# Altium PCB HeaterBoard_v1.PcbDoc
Units mm, origin at the board's own origin, x right, y up, seen from the top; angles counter-clockwise.
Board outline 55.12 x 85.09 mm, 2 copper layers (Top Layer, Bottom Layer); 1 components, 2 nets, 10 pads, 4 vias.
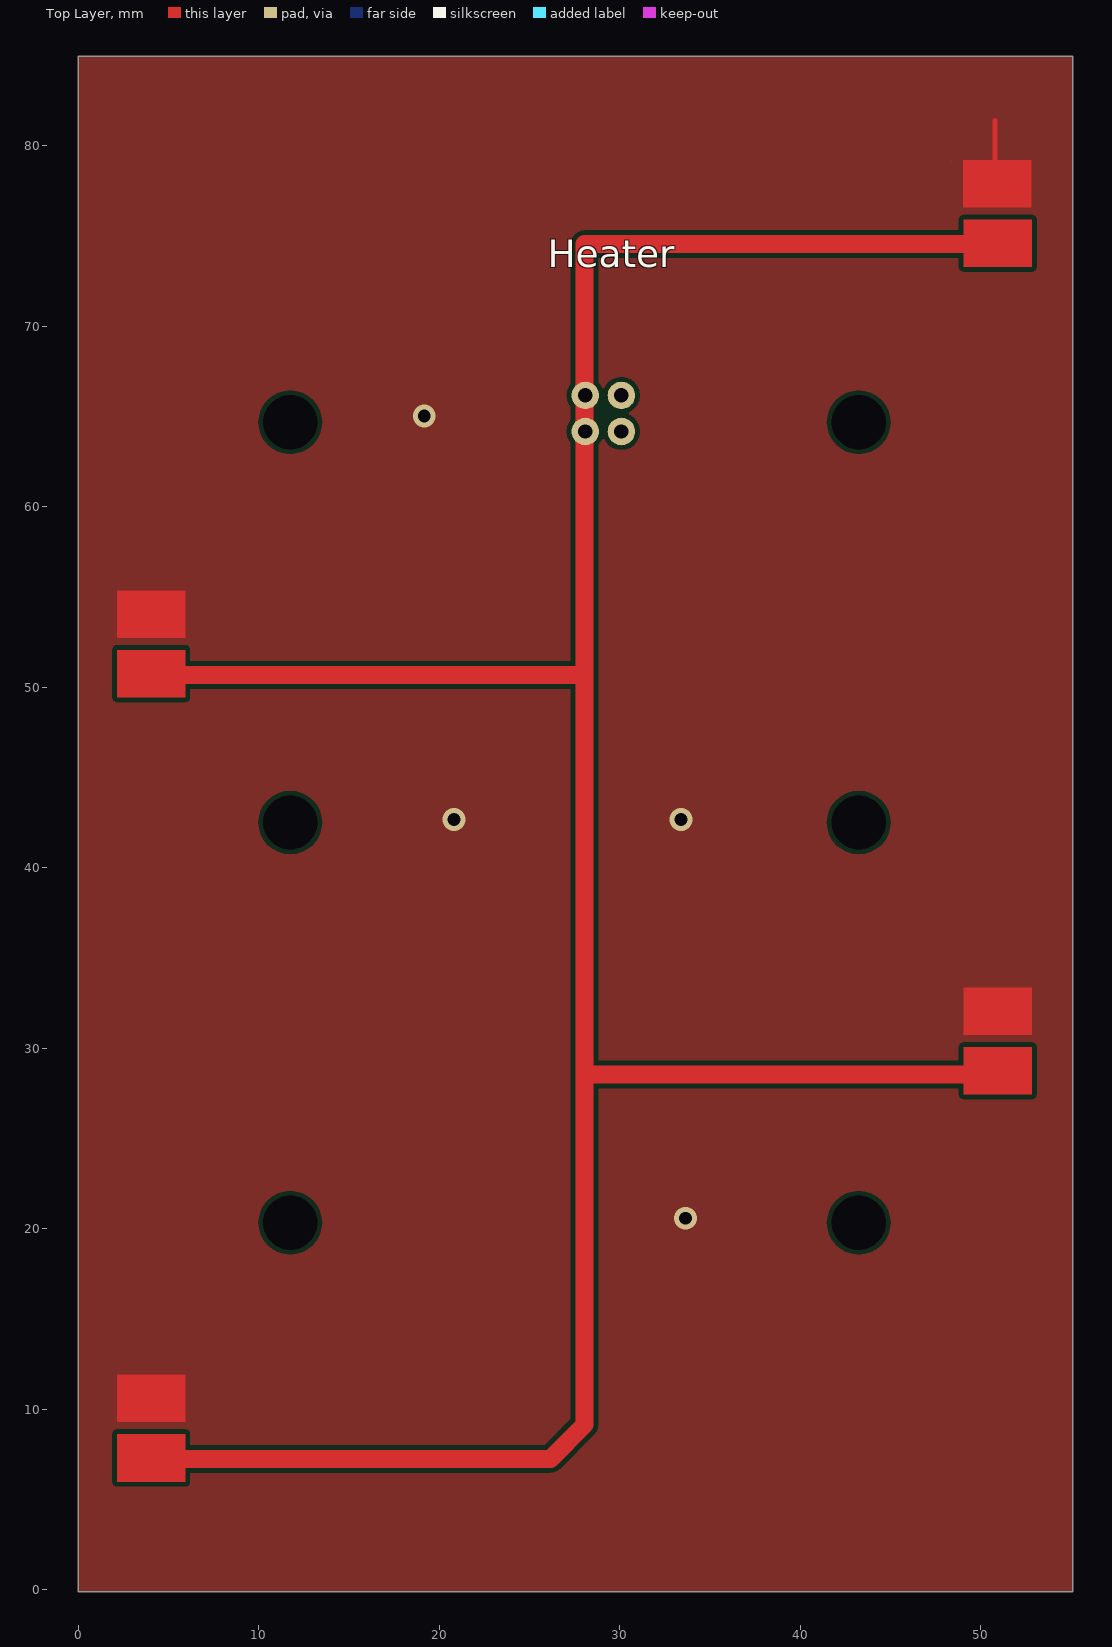
[diagram p0: Top Layer view]
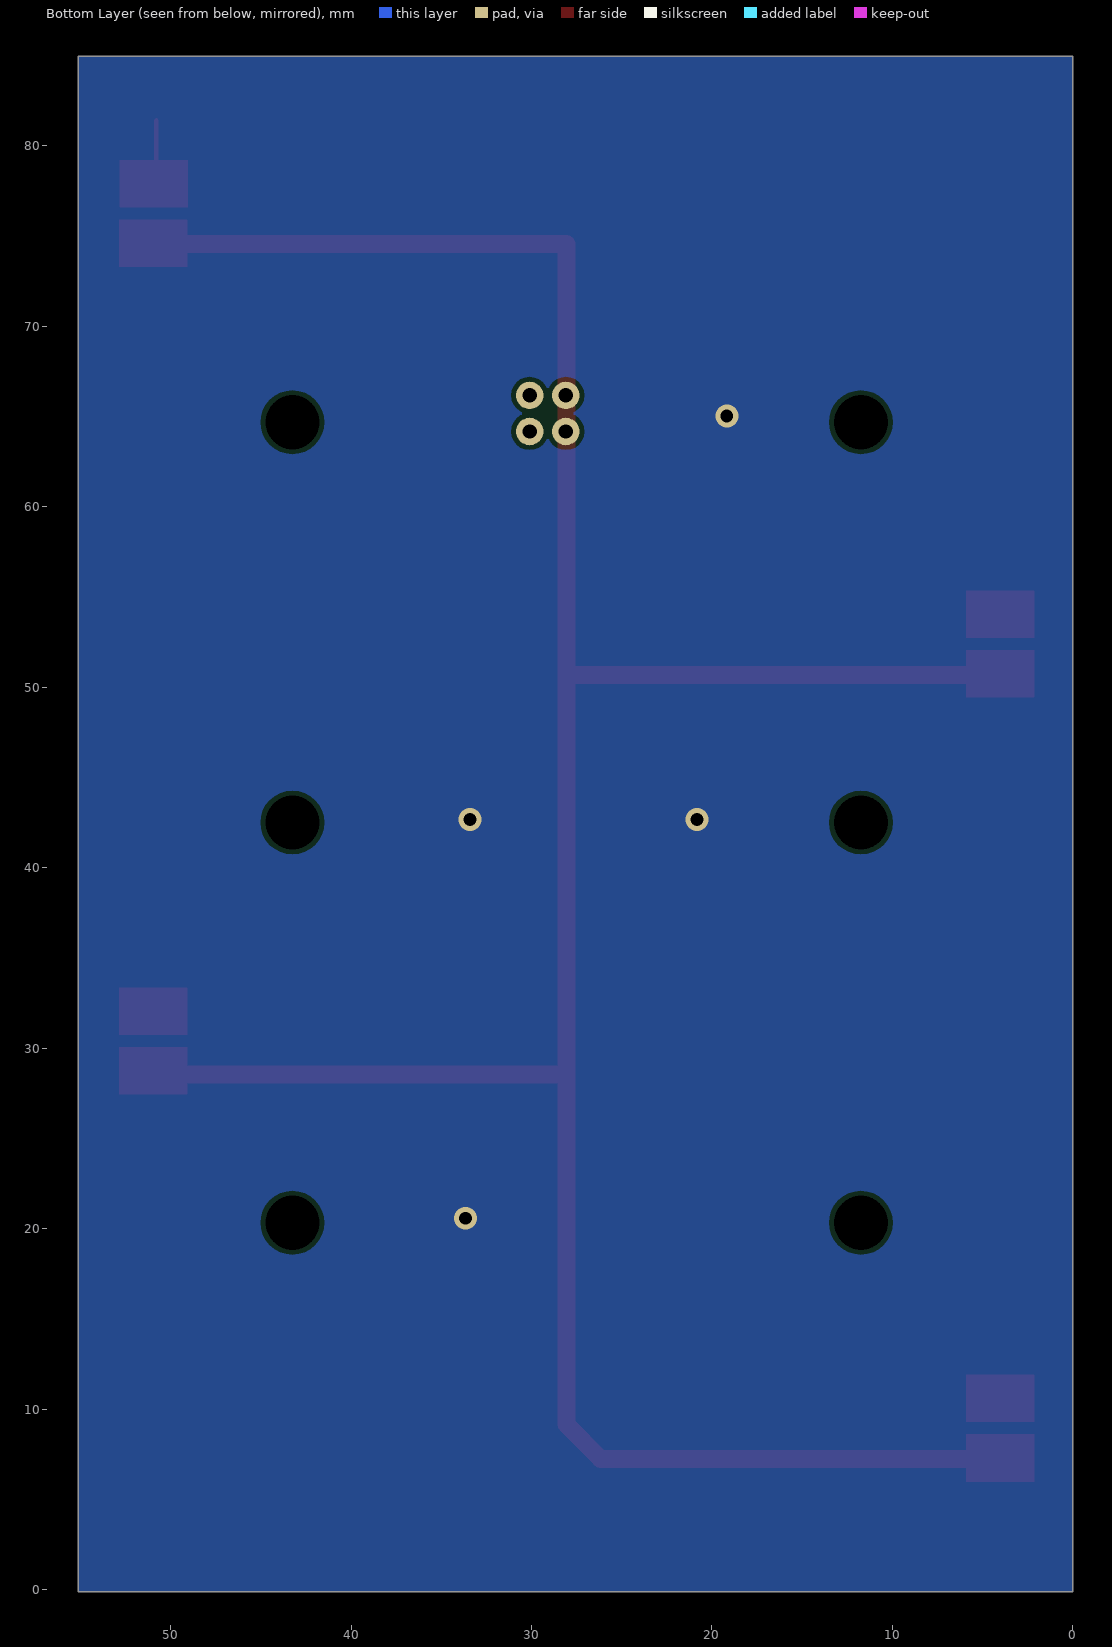
[diagram p1: Bottom Layer view, seen from below]

## Layer stack, top to bottom
Top Solder: solder mask 0.0102, Solder Resist, Dk 3.5
Top Layer: signal copper 0.0356
Dielectric 1: dielectric 0.32, FR-4, Dk 4.8
Bottom Layer: signal copper 0.0356
Bottom Solder: solder mask 0.0102, Solder Resist, Dk 3.5

## Board outline
0,-0.127 0,84.963 55.118,84.963 55.118,-0.127

## Design rules (kind name [scope] priority, off if disabled: settings)
Clearance [All] p1: gap=0.254 ignorepadtopadclearanceinfootprint=FALSE except(0: Arc-Hole Track-Hole SMDPad-Hole THPad-Hole Via-Hole Fill-Hole Poly-Hole Region-Hole Text-Hole)
PolygonConnect PolygonConnect_1 [All vs IsNamedPolygon('GND_L01_P002')] p1: connectstyle=Direct reliefconductorwidth=0.254 reliefentries=4 polygonreliefangle="90 Angle" airgapwidth=0.254
PolygonConnect [All] p2: connectstyle=Direct reliefconductorwidth=0.254 reliefentries=4 polygonreliefangle="90 Angle" airgapwidth=0.254
RoutingVias [All] p1: holewidth=0.711 width=1.27 viastyle="Through Hole" minholewidth=0.711 minwidth=1.27 maxholewidth=0.711 maxwidth=1.27
SolderMaskExpansion [All] p1: expansion=0.102
UnRoutedNet [All] p1: checkbadconnections=TRUE
Width [All] p1: maxlimit=2 minlimit=0.1 preferedwidth=0.254
29 further rules are at their usual default settings.

## Components (designator, comment, footprint, x,y, rotation, side; value= is the part's Value field where it differs from the comment)
Heater "Comment" Heater_board_sidepin 28.099,66.167 r0 top

## Footprints (in the part's own frame and the unit in brackets; to place one, negate y for a bottom-side part, rotate by r counter-clockwise, add the part's x,y. Pads: shape width x height; smd on the part's side, far side on the other; paste and mask are expansions set on the pad)
Heater_board_sidepin [mm]
  round 1.524 hole 0.8: 3(0,-2) 3(0,0) 3(2,-2) 3(2,0)
  body extent -2.33,-2.29 4.32,6.36, height 6.35

## Free pads (board coordinates)
  round 1.524 hole 3: 1(11.75,20.321) 1(11.75,42.5) 1(11.75,64.679) 1(43.25,20.321) 1(43.25,42.5) 1(43.25,64.679)

## Via types
v1: diameter 1.27, hole 0.711, Top Layer to Bottom Layer, 4 vias

## Nets (pads, with @x,y where several pads share a name; then routed paths per layer and width w, separated by ;. In a path a pad name is that pad's centre, name@x,y a point inside that pad or via, vN(x,y) a via of type N, cw(c..) or ccw(c..) an arc to the next point about the centre after c; other vN are vias at no path point)
GND:  | length 3.4
  Top Layer w0.254: 50.8,77.978 50.8,81.407
  other v1: 33.655,20.574 20.828,42.672 33.401,42.672 19.177,65.024
HOT: Heater.3@28.099,64.167 Heater.3@28.099,66.167 | length 158.9
  Top Layer w1: 3.683,7.239 26.162,7.239 28.067,9.144 28.067,74.549 51.435,74.549 ; 5.334,50.673 27.813,50.673 ; 28.321,28.546 50.8,28.546
pads on no net: Heater.3@30.099,64.167 Heater.3@30.099,66.167

## Polygon pours and split planes (outlines as drawn)
GND on Top Layer "GND_L01_P002" (solid, pour order 2): 0,-0.127 0,84.963 55.118,84.963 55.118,-0.127
GND on Bottom Layer "GND-BTTM" (solid, pour order 3): 0,-0.127 0,84.963 55.118,84.963 55.118,-0.127

## Keep-outs
Top Layer:
  region: 48.402,79.121

## Other copper
Top Layer:
  rectangle net HOT: 49.065,73.279 52.86,75.918
  rectangle net GND: 2.14,9.269 5.936,11.909
  rectangle net GND: 49.064,30.732 52.86,33.372
  rectangle net GND: 2.14,52.73 5.936,55.37
  rectangle net HOT: 2.14,5.969 5.936,8.608
  rectangle net HOT: 49.064,27.432 52.86,30.071
  rectangle net HOT: 2.14,49.431 5.936,52.07
  rectangle net GND: 49.037,76.581 52.832,79.22